# Altium PCB 倒立摆pcb.PcbDoc
Units mil, origin at the board's own origin, x right, y up, seen from the top; angles counter-clockwise.
Board outline 3935 x 3935 mil, 2 copper layers (Top Layer, Bottom Layer); 14 components, 44 nets, 132 pads, 5 vias.
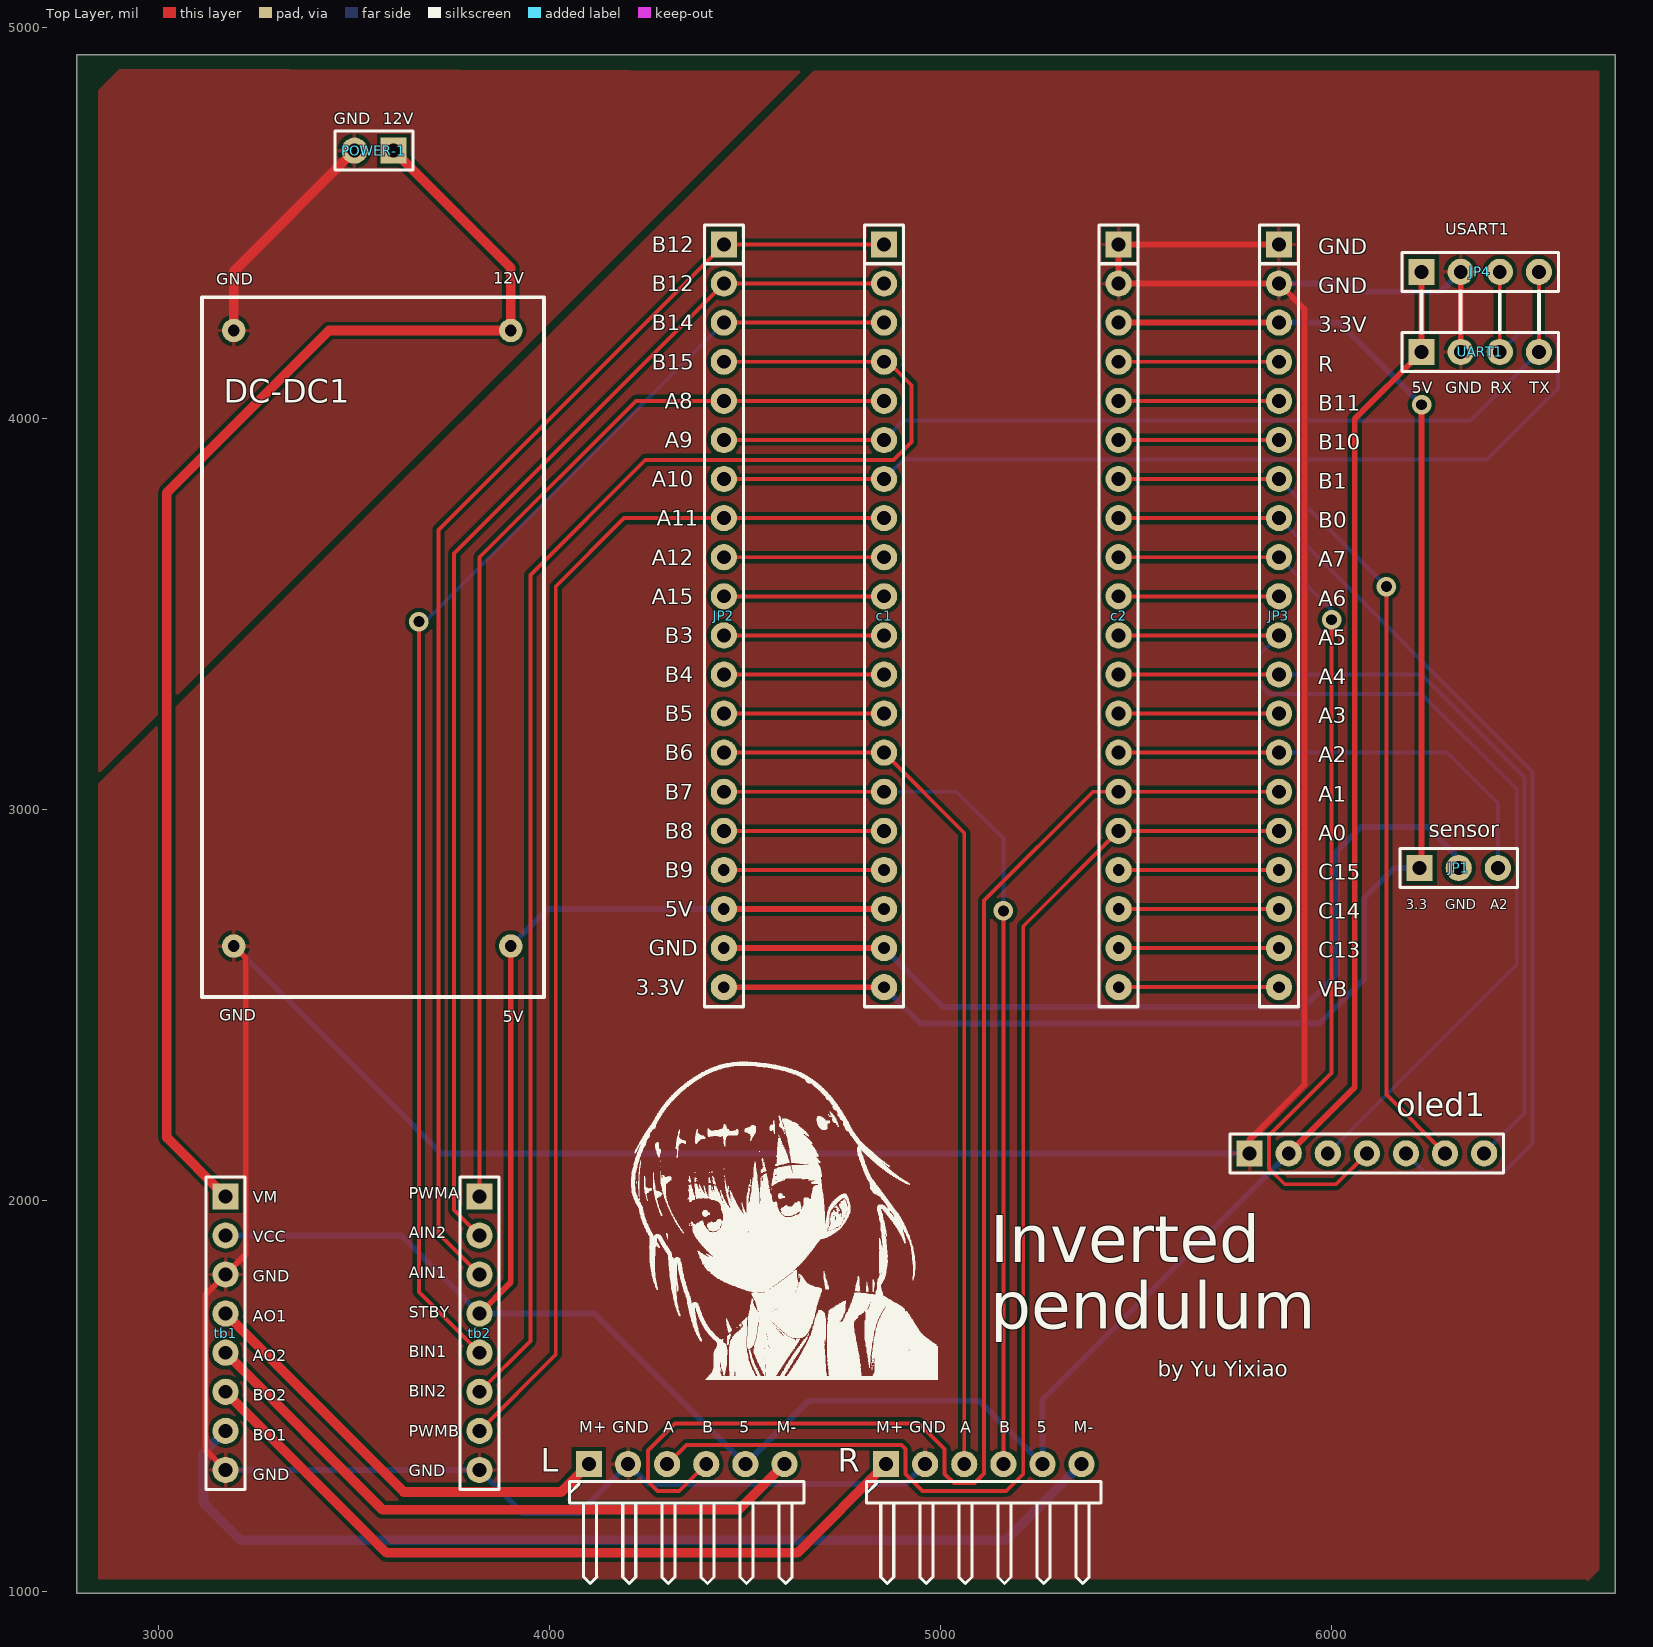
[diagram p0: Top Layer view]
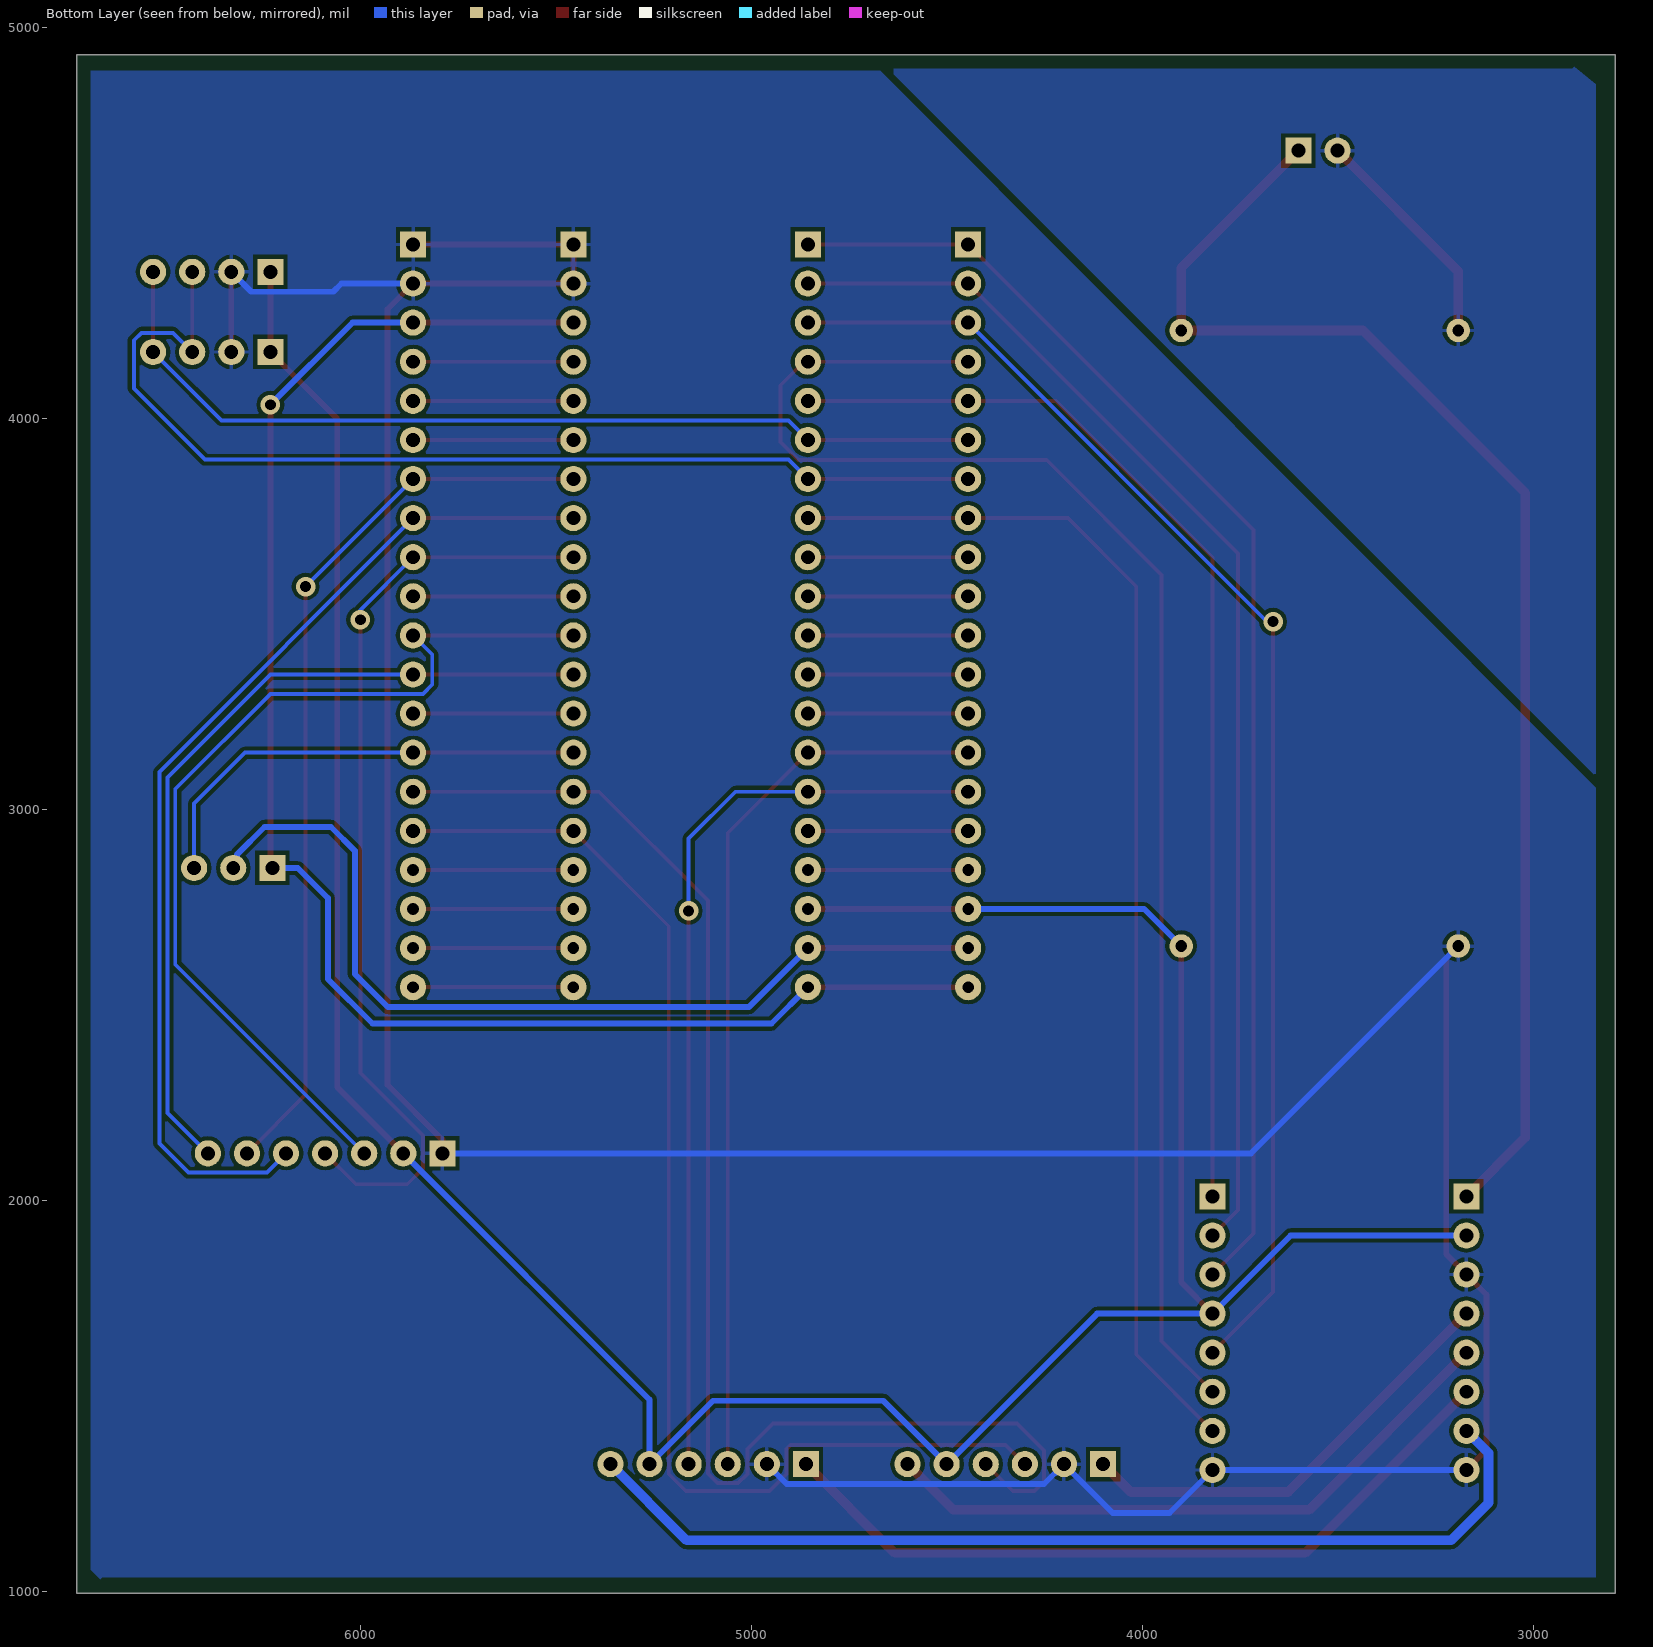
[diagram p1: Bottom Layer view, seen from below]

## Layer stack, top to bottom
Top Solder: solder mask 0.4, Solder Resist, Dk 3.5
Top Layer: signal copper 1.4
Dielectric 1: dielectric 12.6, FR-4, Dk 4.8
Bottom Layer: signal copper 1.4
Bottom Solder: solder mask 0.4, Solder Resist, Dk 3.5

## Board outline
2790,995 2790,4930 6725,4930 6725,995

## Design rules (kind name [scope] priority, off if disabled: settings)
Clearance [All] p1: gap=10 ignorepadtopadclearanceinfootprint=FALSE except(0: Arc-Hole Track-Hole SMDPad-Hole THPad-Hole Via-Hole Fill-Hole Poly-Hole Region-Hole Text-Hole)
PolygonConnect [All] p1: connectstyle=Relief reliefconductorwidth=10 reliefentries=4 polygonreliefangle="90 Angle" airgapwidth=10
RoutingVias [All] p1: holewidth=28 width=50 viastyle="Through Hole" minholewidth=28 minwidth=50 maxholewidth=28 maxwidth=50
SolderMaskExpansion [All] p1: expansion=4 istentingtop=FALSE
Width power-L [InNetClass('power-L')] p1: maxlimit=15 minlimit=15 preferedwidth=15 minimp=50.000000 maximp=50.000000 favimp=50.000000
Width power-H [InNetClass('power-H')] p2: maxlimit=25 minlimit=20 preferedwidth=25 minimp=50.000000 maximp=50.000000 favimp=50.000000
Width [All] p3: maxlimit=10 minlimit=10 preferedwidth=10
30 further rules are at their usual default settings.

## Classes and differential pairs
net class power-L: 5V GND PIN3.3V PINGND
net class power-H: 7.4V GND7.4V ML+ ML- MR+ MR-

## Components (designator, comment, footprint, x,y, rotation, side; value= is the part's Value field where it differs from the comment)
c1 "c8t6-L" HDR2.54-M-LI-20P 4855,3495 r270 top
c2 "c8t6-R" HDR2.54-M-LI-20P 5455,3495 r270 top
DC-DC1 "DC-DC" DC-DC 3900,4225 r270 top
JP1 "HDR-1X3" HDR2.54-LI-3P 6325,2850 r0 top
JP2 "HDR-1X20" HDR2.54-LI-20P 4445,3495 r270 top
JP3 "HDR-1X20" HDR2.54-LI-20P 5865,3495 r270 top
JP4 "HDR-1X4" HDR2.54-LI-4P 6380,4375 r0 top
L "motor-L" HDR2.54-WI-6P 4350,1325 r0 top (schematic designator motor-L1)
oled1 "oled" HDR2.54-M-LI-7P 6090,2120 r0 top
POWER-1 "POWER-7.4V" HDR2.54-LI-2P 3550,4685 r180 top
R "motor-R" HDR2.54-WI-6P 5110,1325 r0 top (schematic designator motor-R2)
tb1 "tb6612-L" HDR2.54-M-LI-8P 3170.39,1660 r270 top
tb2 "tb6612-R" HDR2.54-M-LI-8P 3820,1660 r270 top
UART1 "UART" HDR2.54-M-LI-4P 6380,4170 r0 top

## Footprints (in the part's own frame and the unit in brackets; to place one, negate y for a bottom-side part, rotate by r counter-clockwise, add the part's x,y. Pads: shape width x height; smd on the part's side, far side on the other; paste and mask are expansions set on the pad)
DC-DC [mil]
  round 60 hole 30: 1(0,0) 2(0,-708.66) 3(1574.8,0) 4(1574.8,-708.66)
  silkscreen extent -85,-790 1705,85
HDR2.54-LI-2P [mm] "排针，2脚                         联系卖家 免费查找封装"
  rect 1.7x1.7 hole 0.9: 1(-1.27,0)
  round 1.7 hole 0.9: 2(1.27,0)
  silkscreen extent -2.54,-1.27 2.54,1.27, body extent -2.54,-1.27 2.54,1.27, height 2.54
HDR2.54-LI-3P [mm] "排针，3脚                        联系卖家 免费查找封装"
  rect 1.7x1.7 hole 0.9: 1(-2.54,0)
  round 1.7 hole 0.9: 2(0,0) 3(2.54,0)
  silkscreen extent -3.81,-1.27 3.81,1.27, body extent -3.81,-1.27 3.81,1.27, height 2.54
HDR2.54-LI-4P [mm] "排针，4脚"
  rect 1.7x1.7 hole 0.9: 1(-3.81,0)
  round 1.7 hole 0.9: 2(-1.27,0) 3(1.27,0) 4(3.81,0)
  silkscreen extent -5.08,-1.27 5.08,1.27, body extent -5.08,-1.27 5.08,1.27, height 2.54
HDR2.54-LI-20P [mm] "排针，20脚"
  rect 1.7x1.7 hole 0.9: 1(-24.13,0)
  round 1.7 hole 0.9: 2(-21.59,0) 3(-19.05,0) 4(-16.51,0) 5(-13.97,0) 6(-11.43,0) 7(-8.89,0) 8(-6.35,0) 9(-3.81,0) 10(-1.27,0) 11(1.27,0) 12(3.81,0) 13(6.35,0) 14(8.89,0) 15(11.43,0) 16(13.97,0)
  round 1.7 hole 0.762: 17(16.51,0) 18(19.05,0) 19(21.59,0) 20(24.13,0)
  silkscreen extent -25.4,-1.27 25.4,1.27, body extent -25.4,-1.27 25.4,1.27, height 2.54
HDR2.54-M-LI-4P [mm] "排母，4脚"
  rect 1.7x1.7 hole 0.9: 1(-3.81,0)
  round 1.7 hole 0.9: 2(-1.27,0) 3(1.27,0) 4(3.81,0)
  silkscreen extent -5.08,-1.27 5.08,1.27, body extent -5.08,-1.27 5.08,1.27, height 8.5
HDR2.54-M-LI-7P [mm] "排母，7脚"
  rect 1.7x1.7 hole 0.9: 1(-7.62,0)
  round 1.7 hole 0.9: 2(-5.08,0) 3(-2.54,0) 4(0,0) 5(2.54,0) 6(5.08,0) 7(7.62,0)
  silkscreen extent -8.89,-1.27 8.89,1.27, body extent -8.89,-1.27 8.89,1.27, height 8.5
HDR2.54-M-LI-8P [mm] "排母，8脚"
  rect 1.7x1.7 hole 0.9: 1(-8.89,0)
  round 1.7 hole 0.9: 2(-6.35,0) 3(-3.81,0) 4(-1.27,0) 5(1.27,0) 6(3.81,0) 7(6.35,0) 8(8.89,0)
  silkscreen extent -10.16,-1.27 10.16,1.27, body extent -10.16,-1.27 10.16,1.27, height 8.5
HDR2.54-M-LI-20P [mm] "排母，20脚"
  rect 1.7x1.7 hole 0.9: 1(-24.13,0)
  round 1.7 hole 0.9: 2(-21.59,0) 3(-19.05,0) 4(-16.51,0) 5(-13.97,0) 6(-11.43,0) 7(-8.89,0) 8(-6.35,0) 9(-3.81,0) 10(-1.27,0) 11(1.27,0) 12(3.81,0) 13(6.35,0) 14(8.89,0) 15(11.43,0) 16(13.97,0)
  round 1.7 hole 0.762: 17(16.51,0) 18(19.05,0) 19(21.59,0) 20(24.13,0)
  silkscreen extent -25.4,-1.27 25.4,1.27, body extent -25.4,-1.27 25.4,1.27, height 8.5
HDR2.54-WI-6P [mm] "弯脚排针，6脚"
  rect 1.7x1.7 hole 0.9: 1(-6.35,0)
  round 1.7 hole 0.9: 2(-3.81,0) 3(-1.27,0) 4(1.27,0) 5(3.81,0) 6(6.35,0)
  silkscreen extent -7.62,-7.76 7.62,-1.14, body extent -7.62,-7.77 7.62,1.27, height 4.9

## Part data
JP1: library part "Header 3", "3P接插件", BOM名称=3P接插件, 封装库来自淘宝卖家ID:黄晶宝石=其他店铺购入均为盗版假冒封装库，请立即申请退款，本店现金奖励20~200元, 联系卖家，免费查找封装=唯一出售店铺网址https://shop463601444.taobao.com
JP2 JP3: library part "Header 20", "20P接插件", BOM名称=20P接插件, 封装库来自淘宝卖家ID:黄晶宝石=其他店铺购入均为盗版假冒封装库，请立即申请退款，本店现金奖励20~200元, 联系卖家，免费查找封装=唯一出售店铺网址https://shop463601444.taobao.com
JP4: library part "Header 4", "4P接插件", BOM名称=4P接插件, 封装库来自淘宝卖家ID:黄晶宝石=其他店铺购入均为盗版假冒封装库，请立即申请退款，本店现金奖励20~200元, 联系卖家，免费查找封装=唯一出售店铺网址https://shop463601444.taobao.com

## Via types
v1: diameter 50, hole 28, Top Layer to Bottom Layer, 5 vias

## Nets (pads, with @x,y where several pads share a name; then routed paths per layer and width w, separated by ;. In a path a pad name is that pad's centre, name@x,y a point inside that pad or via, vN(x,y) a via of type N, cw(c..) or ccw(c..) an arc to the next point about the centre after c; other vN are vias at no path point)
5V: c1.18 DC-DC1.3 JP2.18 JP4.1 L.5 oled1.2 R.5 tb1.2 tb2.4 UART1.1 | length 7885.5
  Top Layer w15: tb2.4 3900,1790 DC-DC1.3 ; JP2.18 c1.18 ; oled1.2 6059,2289 6059,3999 UART1.1 JP4.1
  Bottom Layer w15: tb1.2 3620,1910 tb2.4 4115,1710 L.5 4662,1487 5098,1487 R.5 5260,1490 oled1.2 ; DC-DC1.3 3994.8,2745 JP2.18
7.4V: DC-DC1.1 POWER-1.1 tb1.1 | length 3498.5
  Top Layer w25: tb1.1 3020,2160.39 3020,3810 3435,4225 DC-DC1.1 3900,4385 POWER-1.1
A0: c2.16 JP3.16 L.3 | length 3191.5
  Top Layer w10: L.3 4349,1374 4900,1374 4910,1364 4910,1300 4953.47,1256.53 5167.53,1256.53 5211,1300 5211,2701 c2.16 JP3.16
A1: c2.15 JP3.15 L.4 | length 3601.7
  Top Layer w10: L.4 4331,1256 4275,1256 4251,1280 4251,1360 4320,1429 4944.47,1429 5010,1363.47 5010,1300 5033.47,1276.53 5086.53,1276.53 5111,1301 5111,2767 5389,3045 c2.15 JP3.15
A2: c2.14 JP1.3 JP3.14 | length 1188.8
  Top Layer w10: c2.14 JP3.14
  Bottom Layer w10: JP3.14 6295,3145 6425,3015 JP1.3
A3: c2.13 JP3.13 | length 410
  Top Layer w10: c2.13 JP3.13
A4: c2.12 JP3.12 oled1.7 | length 2152
  Top Layer w10: c2.12 JP3.12
  Bottom Layer w10: JP3.12 6230,3345 6493.47,3081.53 6493.47,2223.47 oled1.7
A5: c2.11 JP3.11 oled1.3 | length 2456.3
  Top Layer w10: c2.11 JP3.11
  Bottom Layer w10: JP3.11 5816,3396 5816,3319 5840,3295 6230,3295 6473.47,3051.53 6473.47,2603.47 oled1.3
A6: c2.10 JP3.10 | length 410
  Top Layer w10: c2.10 JP3.10
A7: c2.9 JP3.9 oled1.4 | length 2395.5
  Top Layer w10: c2.9 JP3.9 ; v1(6000,3485) 6000,2326 5840,2166 5840,2081 5880,2041 6011,2041 oled1.4
  Bottom Layer w10: JP3.9 6000,3510 v1(6000,3485)
A8: c1.5 JP2.5 tb2.1 | length 2835.7
  Top Layer w10: tb2.1 3820,3645 4220,4045 JP2.5 c1.5
A9: c1.6 JP2.6 JP4.4 UART1.4 | length 2383.2
  Top Layer w10: JP2.6 c1.6 ; UART1.4 JP4.4
  Bottom Layer w10: c1.6 4905,3995 6355,3995 UART1.4
A10: c1.7 JP2.7 JP4.3 UART1.3 | length 2735.3
  Top Layer w10: JP2.7 c1.7 ; UART1.3 JP4.3
  Bottom Layer w10: c1.7 4905,3895 6397,3895 6579,4077 6579,4200 6560,4219 6479,4219 UART1.3
A11: c1.8 JP2.8 tb2.7 | length 3153.3
  Top Layer w10: tb2.7 4015,1605 4015,3570 4190,3745 JP2.8 c1.8
A12: c1.9 JP2.9 | length 410
  Top Layer w10: JP2.9 c1.9
A15: c1.10 JP2.10 | length 410
  Top Layer w10: JP2.10 c1.10
B0: c2.8 JP3.8 oled1.5 | length 2653.8
  Top Layer w10: c2.8 JP3.8
  Bottom Layer w10: JP3.8 6514,3096 6514,2145 6440,2071 6239,2071 oled1.5
B1: c2.7 JP3.7 oled1.6 | length 2311
  Top Layer w10: c2.7 JP3.7 ; v1(6140,3570) 6140,2270 oled1.6
  Bottom Layer w10: JP3.7 v1(6140,3570)
B3: c1.11 JP2.11 | length 410
  Top Layer w10: JP2.11 c1.11
B4: c1.12 JP2.12 | length 410
  Top Layer w10: JP2.12 c1.12
B5: c1.13 JP2.13 | length 410
  Top Layer w10: JP2.13 c1.13
B6: c1.14 JP2.14 R.3 | length 2314.9
  Top Layer w10: JP2.14 c1.14 5060,2940 R.3
B7: c1.15 JP2.15 R.4 | length 2364.7
  Top Layer w10: JP2.15 c1.15 ; R.4 v1(5160,2740)
  Bottom Layer w10: c1.15 5040,3045 5160,2925 v1(5160,2740)
B8: c1.16 JP2.16 | length 410
  Top Layer w10: JP2.16 c1.16
B9: c1.17 JP2.17 | length 410
  Top Layer w10: JP2.17 c1.17
B10: c2.6 JP3.6 | length 410
  Top Layer w10: c2.6 JP3.6
B11: c2.5 JP3.5 | length 410
  Top Layer w10: c2.5 JP3.5
B12: c1.1 JP2.1 tb2.3 | length 3390.9
  Top Layer w10: tb2.3 3715,1915 3715,3715 JP2.1 c1.1
B13: c1.2 JP2.2 tb2.2 | length 3157.7
  Top Layer w10: tb2.2 3755,1975 3755,3655 JP2.2 c1.2
B14: c1.3 JP2.3 tb2.5 | length 3441.1
  Top Layer w10: v1(3665,3480) 3665,1765 tb2.5 ; JP2.3 c1.3
  Bottom Layer w10: v1(3665,3480) 3680,3480 JP2.3
B15: c1.4 JP2.4 tb2.6 | length 3909.5
  Top Layer w10: tb2.6 3950,1640 3950,3600 4244,3894 4879,3894 4925,3940 4925,4085 4865,4145 4830,4145 JP2.4
C13: c2.19 JP3.19 | length 410
  Top Layer w10: c2.19 JP3.19
C14: c2.18 JP3.18 | length 410
  Top Layer w10: c2.18 JP3.18
C15: c2.17 JP3.17 | length 410
  Top Layer w10: c2.17 JP3.17
GND: c2.1 c2.2 DC-DC1.4 JP3.1 JP3.2 JP4.2 L.2 oled1.1 R.2 tb1.3 tb1.8 tb2.8 UART1.2 | length 10094.1
  Top Layer w15: tb1.8 3119,1361.39 3119,1758.61 tb1.3 3222,1861.61 3222,2619.53 DC-DC1.4 ; oled1.1 5790,2154.94 5930,2294.94 5930,4280 JP3.2 c2.2 c2.1 JP3.1 ; UART1.2 JP4.2
  Bottom Layer w15: tb1.8 tb2.8 3930,1200 4075,1200 L.2 4251,1274 4909,1274 R.2 ; DC-DC1.4 3721.53,2120 oled1.1 ; JP3.2 6048,4345 6069,4324 6279,4324 JP4.2
GND7.4V: DC-DC1.2 POWER-1.2 | length 587.9
  Top Layer w25: DC-DC1.2 3191.34,4376.34 POWER-1.2
ML+: L.1 tb1.4 | length 1147.9
  Top Layer w25: tb1.4 3626.39,1254 4029,1254 L.1
ML-: L.6 tb1.5 | length 1644.6
  Top Layer w25: tb1.5 3572.39,1208 4483,1208 L.6
MR+: R.1 tb1.6 | length 1954.3
  Top Layer w25: tb1.6 3582.39,1098 4633,1098 R.1
MR-: R.6 tb1.7 | length 2573.9
  Bottom Layer w25: tb1.7 3114,1353.61 3114,1226 3210,1130 5165,1130 R.6
PIN3.3V: c1.20 c2.3 JP1.1 JP2.20 JP3.3 | length 4153.7
  Top Layer w15: JP2.20 c1.20 ; c2.3 JP3.3 ; JP1.1 6230,2855 v1(6230,4035)
  Bottom Layer w15: c1.20 4948,2452 5969,2452 6083,2566 6083,2773 6160,2850 JP1.1 ; JP3.3 6020,4245 v1(6230,4035)
PINGND: c1.19 JP1.2 JP2.19 | length 2376.2
  Top Layer w15: JP2.19 c1.19
  Bottom Layer w15: c1.19 5006,2494 5929,2494 6014,2579 6014,2894 6075,2955 6245,2955 6315.06,2884.94 6315.06,2859.94 JP1.2
R: c2.4 JP3.4 | length 410
  Top Layer w10: c2.4 JP3.4
VB: c2.20 JP3.20 | length 410
  Top Layer w10: c2.20 JP3.20

## Polygon pours and split planes (outlines as drawn)
GND7.4V on Top Layer "NONET_L-01_P-001" (solid, pour order 3): 4645,4890 2845,3090 2845,4840 2900,4895
GND on Top Layer "NONET_L-01_P-001" (solid, pour order 2): 3945,4160 4675,4890 6685,4890 6685,1055 6655,1025 6650,1030 2845,1030 2845,3065 3595,3815
no net on Top Layer "NONET_L-01_P-001" (hatched Horizontal grid 20 track 8, pour order 1): 4455,4855
no net on Top Layer "NONET_L-01_P-001" (hatched Horizontal grid 20 track 8, pour order 0): 4860,4880
GND7.4V on Bottom Layer "NONET_L-01_P-001" (solid, pour order 5): 2895,4900 2900,4895 4635,4895 4635,4880 2840,3085 2840,4855
GND on Bottom Layer "NONET_L-01_P-001" (solid, pour order 4): 4670,4890 6690,4890 6690,1055 6665,1030 6660,1035 2840,1035 2840,3055 2855,3070

## Silkscreen, mask and mechanical layers (free items; w line width, h text height)
Top Overlay:
  drawing of 7617 lines, arcs and shapes, not listed
  text "GND" at 3447,4752 h30
  text "12V" at 3572,4752 h30
  text "USART1" at 6290,4470 h30
  text "B12" at 4259.99,4425 h40
  text "GND" at 5965,4420 h40
  text "12V" at 3855,4345 h30
  text "GND" at 3147,4342 h30
  text "B12" at 4259.99,4325 h40
  text "GND" at 5965,4320 h40
  text "B14" at 4259.99,4225 h40
  text "3.3V" at 5965,4220 h40
  text "B15" at 4259.99,4125 h40
  text "R" at 5965,4120 h40
  text "5V" at 6205,4065 h30
  text "GND" at 6290,4065 h30
  text "RX" at 6405,4065 h30
  text "TX" at 6505,4065 h30
  text "A8" at 4293.31,4025 h40
  text "B11" at 5965,4020 h40
  text "A9" at 4293.31,3925 h40
  text "B10" at 5965,3920 h40
  text "A10" at 4259.99,3825 h40
  text "B1" at 5965,3820 h40
  text "A11" at 4273.32,3725 h40
  text "B0" at 5965,3720 h40
  text "A12" at 4259.99,3625 h40
  text "A7" at 5965,3620 h40
  text "A15" at 4259.99,3525 h40
  text "A6" at 5965,3520 h40
  text "B3" at 4293.31,3425 h40
  text "A5" at 5965,3420 h40
  text "B4" at 4293.31,3325 h40
  text "A4" at 5965,3320 h40
  text "B5" at 4293.31,3225 h40
  text "A3" at 5965,3220 h40
  text "B6" at 4293.31,3125 h40
  text "A2" at 5965,3120 h40
  text "B7" at 4293.31,3025 h40
  text "A1" at 5965,3020 h40
  text "sensor" at 6248,2928 h40
  text "B8" at 4293.31,2925 h40
  text "A0" at 5965,2920 h40
  text "B9" at 4293.31,2825 h40
  text "C15" at 5965,2820 h40
  text "3.3" at 6190,2745 h25
  text "GND" at 6290,2745 h25
  text "A2" at 6405,2745 h25
  text "5V" at 4293.31,2725 h40
  text "C14" at 5965,2720 h40
  text "GND" at 4253.32,2625 h40
  text "C13" at 5965,2620 h40
  text "3.3V" at 4220,2525 h40
  text "VB" at 5965,2520 h40
  text "GND" at 3154.32,2458.91 h30
  text "5V" at 3880,2455 h30
  text "PWMA" at 3639.32,2003.91 h30
  text "VM" at 3239.32,1993.91 h30
  text "AIN2" at 3639.32,1902.48 h30
  text "VCC" at 3239.32,1892.48 h30
  text "Inverted" at 5126,1841 h120
  text "AIN1" at 3639.32,1801.05 h30
  text "GND" at 3239.32,1791.05 h30
  text "STBY" at 3639.32,1699.62 h30
  text "AO1" at 3239.32,1689.62 h30
  text "pendulum" at 5126,1670.99 h120
  text "BIN1" at 3639.32,1598.19 h30
  text "AO2" at 3239.32,1588.19 h30
  text "by Yu Yixiao" at 5555,1548.33 h40
  text "BIN2" at 3639.32,1496.77 h30
  text "BO2" at 3239.32,1486.77 h30
  text "M+" at 4075,1405 h30
  text "GND" at 4159.32,1405 h30
  text "A" at 4290,1405 h30
  text "B" at 4390,1405 h30
  text "5" at 4485,1405 h30
  text "M-" at 4580,1405 h30
  text "M+" at 4835,1405 h30
  text "GND" at 4919.32,1405 h30
  text "A" at 5050,1405 h30
  text "B" at 5150,1405 h30
  text "5" at 5245,1405 h30
  text "M-" at 5340,1405 h30
  text "PWMB" at 3639.32,1395.34 h30
  text "BO1" at 3239.32,1385.34 h30
  text "GND" at 3639.32,1293.91 h30
  text "GND" at 3239.32,1283.91 h30
Mechanical 1:
  the board outline again, w10